# Altium PCB efm8sb1-dev-board.PcbDoc
Units mil, origin at the board's own origin, x right, y up, seen from the top; angles counter-clockwise.
Board outline 1075 x 800 mil, 2 copper layers (Top Layer, Bottom Layer), stack 34.8 mil thick; 25 components, 32 nets, 157 pads, 14 vias.
Unrouted connection lines stored in the file: 74.
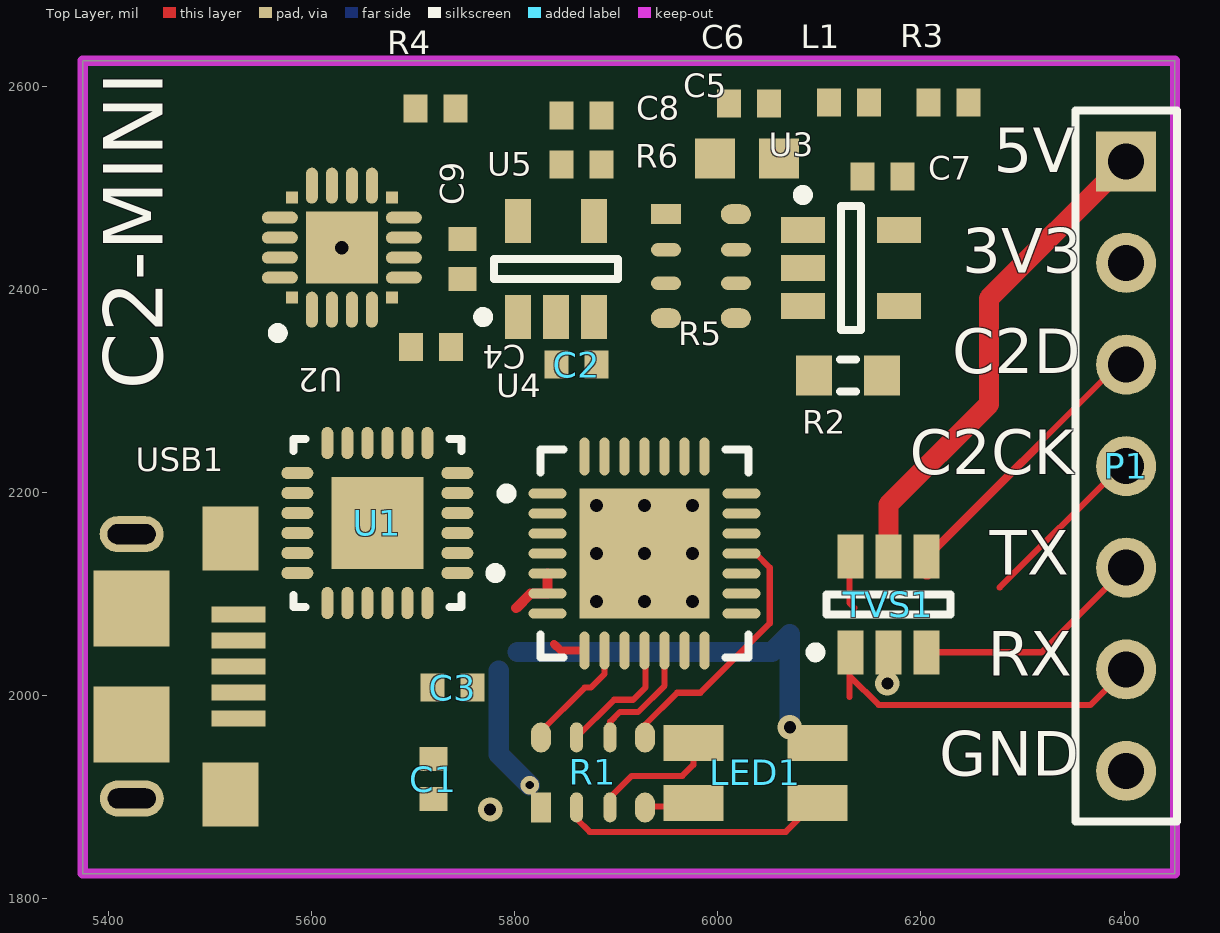
[diagram p0: Top Layer view]
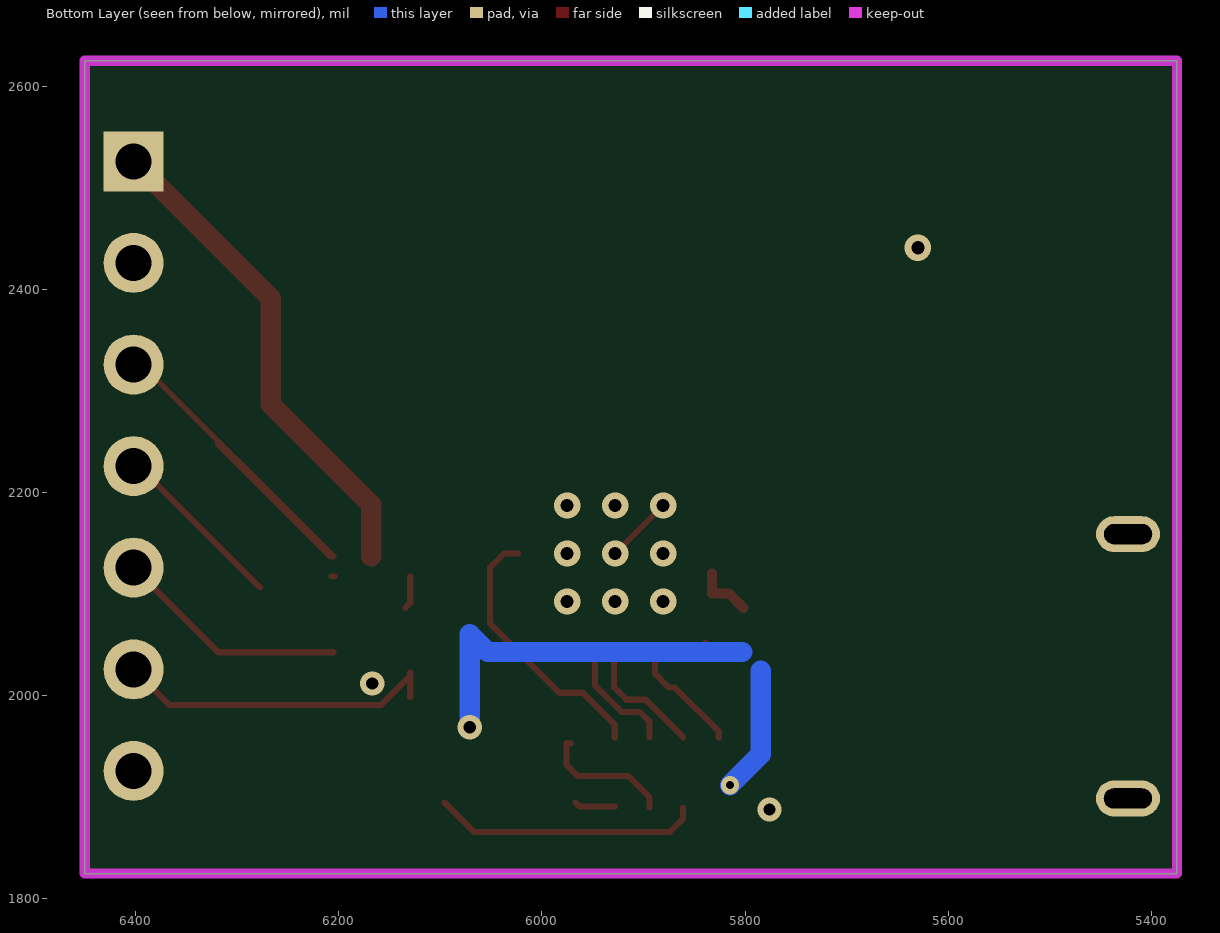
[diagram p1: Bottom Layer view, seen from below]

## Layer stack, top to bottom
Top Solder: solder mask 0.4, Solder Resist, Dk 3.5
Top Layer: signal copper 1.4
Dielectric 1: dielectric 32, FR-4, Dk 4.8
Bottom Layer: signal copper 1.4
Bottom Solder: solder mask 0.4, Solder Resist, Dk 3.5

## Board outline
5375,1825 6450,1825 6450,2625 5375,2625

## Design rules (kind name [scope] priority, off if disabled: settings)
Clearance [All] p1: gap=6 ignorepadtopadclearanceinfootprint=FALSE except(0: Arc-Hole Track-Hole SMDPad-Hole THPad-Hole Via-Hole Fill-Hole Poly-Hole Region-Hole Text-Hole)
ComponentClearance [All] p1: gap=0 collisioncheckmode=3 verticalgap=0 showdistances=FALSE
DiffPairsRouting [All] p1: maxlimit=10 minlimit=6 mostfreqgap=10 toplayer_minwidth=6 toplayer_maxwidth=15 toplayer_prefwidth=8 bottomlayer_minwidth=6 bottomlayer_maxwidth=15 bottomlayer_prefwidth=8 maxuncoupledlength=500
HoleSize [All] p1: absolutevalues=TRUE maxlimit=500 minlimit=12 maxpercent=80.000 minpercent=20.000
HoleToHoleClearance [All] p1: gap=0 allowstackedmicrovias=TRUE
MinimumSolderMaskSliver [All] p1: minsoldermaskwidth=0
PlaneConnect [All] p1: planeconnectstyle=Direct reliefexpansion=20 reliefentries=4 reliefconductorwidth=10 reliefairgap=10
PolygonConnect [All] p1: connectstyle=Direct reliefconductorwidth=10 reliefentries=4 polygonreliefangle="90 Angle" airgapwidth=10
RoutingVias [All] p1: holewidth=12 width=24 viastyle="Through Hole" minholewidth=12 minwidth=24 maxholewidth=28 maxwidth=50
SilkToSilkClearance [All] p1: silktosilkclearance=0
SilkToSolderMaskClearance [IsPad] p1: minsilkscreentomaskgap=0 clearancetoexposedcopper=TRUE
SolderMaskExpansion [All] p1: expansion=0
Width [All] p1: maxlimit=500 minlimit=6 preferedwidth=8
22 further rules are at their usual default settings.

## Classes and differential pairs
net class Hub_Nets: NetU1_6 NetU1_7 NetU1_8 NetU1_10 NetU1_11 NetU1_12 NetU1_13 NetU1_14 NetU1_15 NetU1_16 NetU1_17 NetU1_21 NetU1_22 NetU1_23 NetU1_24
net class "Energy Monitor_Nets": 3V3A AGND CURSENSE_3 EM_C2CK_3 EM_C2D_3 EM_RANGE1_3 EM_RANGE2_3 NetC8_1 NetC8_2 NetL1_2 NetU2_8 NetU2_11 NetU2_13 NetU2_14 NetU2_15 NetU2_16 NetU2_19 NetU2_20
net class efm8sb1-dev-board_Nets: NetUSB1_4
net class Debugger_Nets: C2CK C2D LED_RUN LED_STOP NetLED1_2 NetLED1_3 NetLED1_4 NetU4_13 NetU4_14 NetU4_15 NetU4_16 NetU4_17 NetU4_19 NetU4_20 NetU4_21 NetU4_22 NetU4_23 NetU4_24 NetU4_25 NetU4_26 NetU4_27 POWER
component class Hub: U1
component class "Energy Monitor": C1 C2 C3 C5 C6 C7 C8 C9 L1 R2 R3 R4 R5 R6 U2 U3 U5
component class efm8sb1-dev-board: P1 TVS1 USB1
component class Debugger: C4 LED1 R1 U4

## Components (designator, comment, footprint, x,y, rotation, side; value= is the part's Value field where it differs from the comment)
C1 "0u1" CAPC1005N 5720,1918 r90 top
C2 "5.6nF" CAPC1005N 5861,2326 r0 top
C3 "5.6nF" CAPC1005N 5739,2008 r0 top
C4 "0u1" CAPC1005N 5718,2343 r180 top
C5 "10u" CAPC1608N 6029,2529 r180 top
C6 "0u1" CAPC1005N 6031,2583 r180 top
C7 "0u1" CAPC1005N 6162,2511 r0 top
C8 "10p" CAPC1005N 5866,2571 r180 top
C9 "0u1" CAPC1005N 5749,2430 r90 top
L1 "Inductor" INDC1005N 6129,2584 r0 top value=330R
LED1 "LED3528" LED3528 6037,1924 r0 top
P1 "Header 7" HDR1X7-PINS 6402,2526 r270 top
R1 "Res Pack5" RESNET_8_1206 5828,1890 r90 top value=10K
R2 "4R7" RESC1608N 6128,2315 r0 top
R3 "10R" RESC1005N 6227,2584 r0 top
R4 "0R" RESC1005N 5722,2578 r0 top
R5 "Res Pack5" RESNET_8_1206 5949,2472 r0 top value=1K
R6 "200k" RESC1005N 5866,2523 r180 top
TVS1 "ESD TVS-5" SOT26A-6N 6168,2090 r90 top
U1 "USB2422/MJ" QFN50P400X400-24V2N 5665,2170 r180 top
U2 "EFM8UB10F16G-B-QFN20" QFN50P300X300X90-20N 5630,2441 r90 top
U3 "INA180A1IDBVR" SOT23-5AN 6131,2421 r0 top
U4 "C8051F326-GM" QFN50P500X500-28VAN 5928,2140 r0 top
U5 "TSV991ILT" SOT23-5AN 5841,2420 r90 top
USB1 "USB Micro B Receptacle" 10118193-0001LF 5555,2029 r270 top

## Footprints (in the part's own frame and the unit in brackets; to place one, negate y for a bottom-side part, rotate by r counter-clockwise, add the part's x,y. Pads: shape width x height; smd on the part's side, far side on the other; paste and mask are expansions set on the pad)
10118193-0001LF [mm]
  oval 0.9x1.6 hole 0.5 slot 1.2 at 90 deg: 0(-3.304,-3.35) 0(3.304,-3.346)
  rect 1.6x1.4 smd: 0(-3.2,-0.875) 0(3.2,-0.875)
  rect 1.9x1.9 smd: 0(-1.45,-3.35) 0(1.45,-3.35)
  rect 0.4x1.35 smd: 1(-1.3,-0.675) 2(-0.65,-0.675) 3(0,-0.675) 4(0.65,-0.675) 5(1.3,-0.675)
  body extent -3.93,-6.1 3.93,-0.44, height 2.83
CAPC1005N [mm] "Chip Capacitor (0402), Body 1.0x0.5mm, IPC Medium Density"
  rect 0.6x0.7 smd: 1(-0.5,0) 2(0.5,0)
  body extent -0.51,-0.26 0.51,0.26, height 0.61
CAPC1608N [mm] "Chip Capacitor (0603), Body 1.6x0.8mm, IPC Medium Density"
  rect 1x1 smd: 1(-0.8,0) 2(0.8,0)
  body extent -0.8,-0.41 0.8,0.41, height 0.91
HDR1X7-PINS [mm] "Connector; Header; 7 Position"
  rect 1.5x1.5 hole 0.9: 1(0,0)
  round 1.5 hole 0.9: 2(2.54,0) 3(5.08,0) 4(7.62,0) 5(10.16,0) 6(12.7,0) 7(15.24,0)
  silkscreen extent -1.27,-1.27 16.51,1.27, body extent -1.27,-1.22 16.51,1.22, height 10.3
INDC1005N [mm] "Chip Inductor, Body 1.0x0.5mm, IPC Medium Density"
  rect 0.6x0.7 smd: 1(-0.5,0) 2(0.5,0)
  body extent -0.59,-0.32 0.59,0.32, height 0.65
LED3528 [mm]
  rect 1.5x0.9 smd paste+0: 1(1.55,0.75) 2(1.55,-0.75) 3(-1.55,0.75) 4(-1.55,-0.75)
  body extent -1.78,-1.4 1.73,1.4, height 1.9
QFN50P300X300X90-20N [mm] "QFN, 16+4 Leads, Body 3.00x3.00mm, Pitch 0.50mm, IPC Medium Density"
  rect 0.3x0.3 smd: 1(-1.25,1.25) 6(-1.25,-1.25) 11(1.25,-1.25) 16(1.25,1.25)
  oval 0.9x0.3 smd: 2(-1.55,0.75) 3(-1.55,0.25) 4(-1.55,-0.25) 5(-1.55,-0.75) 12(1.55,-0.75) 13(1.55,-0.25) 14(1.55,0.25) 15(1.55,0.75)
  oval 0.3x0.9 smd: 7(-0.75,-1.55) 8(-0.25,-1.55) 9(0.25,-1.55) 10(0.75,-1.55) 17(0.75,1.55) 18(0.25,1.55) 19(-0.25,1.55) 20(-0.75,1.55)
  rect 1.8x1.8 smd mask+0: 21(0,0)
  silkscreen extent -2.26,1.48 -2.01,1.72, body extent -1.5,-1.5 1.5,1.5, height 0.92
QFN50P400X400-24V2N [mm] "QFN, 24-Leads, Body 4x4mm, Pitch 0.5mm, IPC Medium Density"
  oval 0.8x0.3 smd: 1(-2,1.25) 2(-2,0.75) 3(-2,0.25) 4(-2,-0.25) 5(-2,-0.75) 6(-2,-1.25) 13(2,-1.25) 14(2,-0.75) 15(2,-0.25) 16(2,0.25) 17(2,0.75) 18(2,1.25)
  oval 0.3x0.8 smd: 7(-1.25,-2) 8(-0.75,-2) 9(-0.25,-2) 10(0.25,-2) 11(0.75,-2) 12(1.25,-2) 19(1.25,2) 20(0.75,2) 21(0.25,2) 22(-0.25,2) 23(-0.75,2) 24(-1.25,2)
  rect 2.3x2.3 smd: 25(0,0)
  silkscreen extent -3.08,-2.1 2.1,2.1, body extent -1.99,-2.01 2.01,1.99, height 1
QFN50P500X500-28VAN [mm] "28-Pin Plastic Quad Flat No-Lead 0.5 mm Pitch, 3.25 x 3.25 thermal pad"
  oval 0.95x0.25 smd: 1(-2.425,1.5) 2(-2.425,1) 3(-2.425,0.5) 4(-2.425,0) 5(-2.425,-0.5) 6(-2.425,-1) 7(-2.425,-1.5) 15(2.425,-1.5) 16(2.425,-1) 17(2.425,-0.5) 18(2.425,0) 19(2.425,0.5) 20(2.425,1) 21(2.425,1.5)
  oval 0.25x0.95 smd: 8(-1.5,-2.425) 9(-1,-2.425) 10(-0.5,-2.425) 11(0,-2.425) 12(0.5,-2.425) 13(1,-2.425) 14(1.5,-2.425) 22(1.5,2.425) 23(1,2.425) 24(0.5,2.425) 25(0,2.425) 26(-0.5,2.425) 27(-1,2.425) 28(-1.5,2.425)
  rect 3.25x3.25 smd: 29(0,0)
  silkscreen extent -3.57,-2.6 2.6,2.6, body extent -2.5,-2.5 2.5,2.5, height 1
RESC1005N [mm] "Chip Resistor, Body 1.1x0.5mm, IPC Medium Density"
  rect 0.6x0.7 smd: 1(-0.5,0) 2(0.5,0)
  body extent -0.5,-0.25 0.5,0.25, height 0.35
RESC1608N [mm] "Chip Resistor, Body 1.6x0.8mm, IPC Medium Density"
  rect 0.9x1 smd: 1(-0.85,0) 2(0.85,0)
  silkscreen extent -0.2,-0.4 0.2,0.4, body extent -0.8,-0.4 0.8,0.4, height 0.55
RESNET_8_1206 [mm]
  rect 0.75x0.5 smd: 1(0,0.05)
  oval 0.75x0.33 smd: 2(0.003,-0.838) 3(0.003,-1.676) 6(1.753,-1.676) 7(1.753,-0.838)
  oval 0.75x0.5 smd: 4(0,-2.55) 5(1.75,-2.55) 8(1.75,0.05)
  body extent 0.09,-2.84 1.69,0.36, height 0.5
SOT23-5AN [mm] "SOT23, 5-Leads, Body 2.9x1.6mm, Pitch 0.95mm, Lead Span 2.8mm, IPC Medium Density"
  rect 1.1x0.65 smd: 1(-1.2,0.95) 2(-1.2,0) 3(-1.2,-0.95) 4(1.2,-0.95) 5(1.2,0.95)
  silkscreen extent -1.32,-1.55 0.25,1.95, body extent -1.5,-1.5 1.5,1.5, height 1.3
SOT26A-6N [mm] "SOT23, 6-Leads, Body 2.9x1.7mm, Pitch 0.95mm, Lead Span 2.8mm, IPC Medium Density"
  rect 1.1x0.65 smd: 1(-1.2,0.95) 2(-1.2,0) 3(-1.2,-0.95) 4(1.2,-0.95) 5(1.2,0) 6(1.2,0.95)
  silkscreen extent -1.32,-1.55 0.25,1.95, body extent -1.5,-1.5 1.5,1.5, height 1.3

## Part data
C1 C2 C3 C4 C5 C6 C7 C8 C9: library part "Cap Semi", "Capacitor (Semiconductor SIM Model)", LatestRevisionDate=29-May-2009, LatestRevisionNote="IPC-7351 Footprint Added.", PackageDescription="Chip Capacitor", PackageReference=C1206, Published=8-Jun-2000, Publisher="Altium Limited"
LED1: library part LED_RGB, "RGB LED", Supplier Part Number 1=732-4998-1-ND, LatestRevisionDate=08-Jul-2005, LatestRevisionNote="Mech Layer 1 removed.", PackageDescription="LED; 2 Leads", PackageReference=LED-0, Published=8-Jun-2000, Publisher="Altium Limited", Supplier 1=Digi-Key
P1: "Header, 7-Pin", LatestRevisionDate=17-Jul-2002, LatestRevisionNote="Re-released for DXP Platform.", Publisher="Altium Limited"
R1 R5: "Isolated Resistor Network - Parts", Code_IPC=SOIC127P600-16, Code_JEDEC=MS-012-AC, LatestRevisionDate=29-May-2009, LatestRevisionNote="IPC-7351 Footprint Added.", PackageDescription="16-Pin Small Outline Integrated Circuit 1.27 mm Pitch", PackageReference=SOIC16, Published=24-Mar-1999, Publisher="Altium Limited", Sim Note="Enter the Resistance value into parameter field."
R2 R3 R4 R6: library part "Res Semi", "Semiconductor Resistor", LatestRevisionDate=17-Jul-2002, LatestRevisionNote="Re-released for DXP Platform.", PackageDescription="Axial Device, Thru-Hole; 2 Leads; 0.5 in Pin Spacing", PackageReference=AXIAL-0.5, Published=8-Jun-2000, Publisher="Altium Limited"
TVS1: "5-channel ESD protection device for USB", Manufacturer Part Number 1=IP4220CZ6,125, Manufacturer Part Number 2=SRV05-4, Supplier Part Number 1=1727-3578-1-ND, Supplier 1=Digi-Key
U1: "IC HUB CTLR USB 2.0 24QFN", Base Part Number=USB2422, Current - Supply=-, Manufacturer="Microchip Technology", Operating Temperature="0°C ~ 70°C", Package / Case="24-VFQFN Exposed Pad", Supplier Device Package="24-QFN (4x4)", Supplier Part Number 1=USB2422/MJ-ND, Voltage - Supply=3.3V, Category="Integrated Circuits (ICs)", ComponentLink1Description=http://www.microchip.com/mymicrochip/filehandler.aspx?ddocname=en566992, ComponentLink1URL=http://www.microchip.com/mymicrochip/filehandler.aspx?ddocname=en566992, Function="Hub Controller", Interface=USB, Manufacturer Part Number=USB2422/MJ, Packaging=Tray, Part Status=Active, Pricing 1="1=1.6, 25=1.3288, 100=1.2875 (USD)", Protocol=USB, RoHS="RoHS Compliant", Standards="USB 2.0", Stock 1=2537, Supplier 1=Digi-Key
U2: "IC MCU 16KB 20QFN", Manufacturer="Silicon Labs", Operating Temperature="-40°C ~ 85°C", Package / Case="20-UFQFN Exposed Pad", Supplier Device Package="20-QFN (3x3)", Supplier Part Number 1=336-3182-5-ND, Voltage - Supply (Vcc/Vdd)="2.2 V ~ 5.25 V", Category="Integrated Circuits (ICs)", ComponentLink1Description=http://www.silabs.com/Support%20Documents/TechnicalDocs/EFM8UB1_DataSheet.pdf, ComponentLink1URL=http://www.silabs.com/Support%20Documents/TechnicalDocs/EFM8UB1_DataSheet.pdf, Connectivity="I²C, SMBus, SPI, UART/USART, USB", Core Processor="CIP-51 8051", Core Size=8-Bit, Data Converters="A/D 11x12b", EEPROM Size=-, Manufacturer Part Number=EFM8UB10F16G-B-QFN20, Number of I/O=13, Oscillator Type=Internal, Packaging=Tube, Peripherals="Brown-out Detect/Reset, POR, PWM, WDT", Pricing 1="1=1.18, 25=1.0832, 100=0.9848, 1000=0.88628 (USD)", Program Memory Size="16KB (16K x 8)", Program Memory Type=FLASH, RAM Size="2.25K x 8", RoHS="RoHS Compliant", Speed=50MHz, Stock 1=75, Supplier 1=Digi-Key
U3: Current - Supply=260µA, Manufacturer="Texas Instruments", Operating Temperature="-40°C ~ 125°C", Package / Case="SC-74A, SOT-753", Supplier Device Package=SOT-23-5, Supplier Part Number 1=296-47652-1-ND, Voltage - Supply, Single/Dual (±)="2.7 V ~ 5.5 V", Amplifier Type="Current Sense", Category="Integrated Circuits (ICs)", ComponentLink1Description=http://www.ti.com/lit/ds/symlink/ina180.pdf, ComponentLink1URL=http://www.ti.com/lit/ds/symlink/ina180.pdf, Manufacturer Part Number=INA180A1IDBVR, Mounting Type="Surface Mount", Output Type=Rail-to-Rail, Packaging="Cut Tape (CT)", Part Status=Active, Pricing 1="1=0.6, 10=0.51, 100=0.3807, 500=0.29912, 1000=0.23113 (USD)", RoHS="RoHS Compliant", Slew Rate="2 V/µs", Stock 1=1952, Supplier 1=Digi-Key
U4: "IC MCU 8BIT 16KB FLASH 28QFN", Manufacturer="Silicon Labs", Operating Temperature="-40°C ~ 85°C (TA)", Package / Case="28-VFQFN Exposed Pad", Supplier Device Package="28-QFN (5x5)", Supplier Part Number 1=CF326-SX0261GM, Voltage - Supply (Vcc/Vdd)="2.7 V ~ 3.6 V", Category="Integrated Circuits (ICs)", ComponentLink1Description=http://www.silabs.com/documents/public/data-sheets/C8051F326.pdf, ComponentLink1URL=http://www.silabs.com/documents/public/data-sheets/C8051F326.pdf, Connectivity="UART/USART, USB", Core Processor=8051, Core Size=8-Bit, Data Converters=-, EEPROM Size=-, Manufacturer Part Number=C8051F326-GM, Number of I/O=15, Oscillator Type=Internal, Packaging=Tube, Part Status=Active, Peripherals=POR, Pricing 1="1=1.42, 25=1.3632, 100=1.3108, 1000=1.26561 (USD)", Program Memory Size="16KB (16K x 8)", Program Memory Type=FLASH, RAM Size="1.5K x 8", RoHS="RoHS Compliant", Speed=25MHz, Stock 1=1461, Supplier 1=Digi-Key
U5: "IC OPAMP GP 20MHZ RRO SOT23-5", Base Part Number=TSV991, Current - Supply=820µA, Manufacturer=STMicroelectronics, Operating Temperature="-40°C ~ 125°C", Package / Case="SC-74A, SOT-753", Supplier Device Package=SOT-23-5, Supplier Part Number 1=497-6001-1-ND, Voltage - Supply, Single/Dual (±)="2.5 V ~ 5.5 V", Amplifier Type="General Purpose", Category="Integrated Circuits (ICs)", ComponentLink1Description=http://www.st.com/content/ccc/resource/technical/document/datasheet/d8/e3/a5/aa/8f/d7/42/67/CD00144611.pdf/files/CD00144611.pdf/jcr:content/translations/en.CD00144611.pdf, ComponentLink1URL=http://www.st.com/content/ccc/resource/technical/document/datasheet/d8/e3/a5/aa/8f/d7/42/67/CD00144611.pdf/files/CD00144611.pdf/jcr:content/translations/en.CD00144611.pdf, Manufacturer Part Number=TSV991ILT, Mounting Type="Surface Mount", Output Type=Rail-to-Rail, Packaging="Cut Tape (CT)", Part Status=Active, Pricing 1="1=0.76, 10=0.673, 100=0.516, 500=0.40788, 1000=0.3263 (USD)", RoHS="RoHS Compliant", Slew Rate="10 V/µs", Stock 1=2760, Supplier 1=Digi-Key
L1: Code_IEC=1005, Code_JEITA=0402, LatestRevisionDate=29-May-2009, LatestRevisionNote="IPC-7351 Footprint Added.", PackageDescription="Chip Inductor", PackageReference=0402-A, Published=8-Jun-2000, Publisher="Altium Limited"

## Via types
v1: diameter 25.98, hole 12.99, Top Layer to Bottom Layer, tented both sides, 9 vias
v2: diameter 24, hole 12, Top Layer to Bottom Layer, tented both sides, 3 vias
v3: diameter 25.98, hole 12.99, Top Layer to Bottom Layer, tented top, 1 vias
v4: diameter 18, hole 8, Top Layer to Bottom Layer, tented both sides, 1 vias

## Nets (pads, with @x,y where several pads share a name; then routed paths per layer and width w, separated by ;. In a path a pad name is that pad's centre, name@x,y a point inside that pad or via, vN(x,y) a via of type N, cw(c..) or ccw(c..) an arc to the next point about the centre after c; other vN are vias at no path point)
3V3: C1.2 C4.2 L1.1 LED1.1 R1.1 R2.1 R5.8 U1.1 U1.9 U1.18 U2.6 U2.7 U3.3 U4.5 U4.6 U4.7 | length 548.7
  Top Layer w10: 5801.55,2086.27 5815.92,2100.63 U4.6 U4.5
  Bottom Layer w20: 5784.6,2024.6 5784.6,1942.4 v4(5815,1912) ; 5803,2043 6053.4,2043 6071,2060.6 v2(6071,1969)
3V3A: C5.2 C6.2 C7.2 C9.2 R3.2 U3.5 U5.5
3V_TARGET: P1.2 R2.2 U3.4
AGND: C2.1 C3.1 C5.1 C6.1 C7.1 C9.1 R4.2 R5.5 U3.2 U5.2
  other v2: 5776,1888
C2CK: R1.8 U4.9 | length 115.1
  Top Layer w6: R1.8 5826.03,1964.9 5869.13,2008 5875.13,2008 5888.63,2021.5 U4.9
C2CLK_1: P1.4 TVS1.6 U4.1 | length 206.5
  Top Layer w6: TVS1.6@6129.6,2117.24 6129.6,2091.4 6134.41,2086.59 ; 6277.59,2106.59 6397,2226 P1.4
C2D: U4.10 | length 0.4
  Top Layer w8: U4.10@5908,2044.21 U4.10
C2DAT_1: P1.3 TVS1.4 U4.28 | length 434.3
  Top Layer w6: TVS1.4@6204.4,2117.24 TVS1.4@6207.24,2117.24 ; TVS1.4 6394.16,2326 P1.3 ; TVS1.4@6208.24,2137.24 6319,2248
CURSENSE_3: R5.7 U3.1
D1_1_N: U1.2 U4.4
D1_1_P: U1.3 U4.3
D2_1_N: U1.4 U2.5
D2_1_P: U1.5 U2.4
D_1_N: U1.19 USB1.2
D_1_P: U1.20 USB1.3
EM_C2CK_3: R5.1 U2.9
EM_C2D_3: U2.10
EM_RANGE1_3: C2.2 R5.2 U2.2 U5.3
EM_RANGE2_3: C3.2 R5.3 U2.1
GND: C1.1 C4.1 P1.7 R4.1 TVS1.2 U1.25 U2.3 U2.12 U2.21 U4.2 U4.29 USB1.5 | length 55.7
  Top Layer w6: U4.29@5888.63,2179.37 v1(5928,2140)
  other v1: 5880.76,2092.76 5928,2092.76 5975.24,2092.76 5880.76,2140 5975.24,2140 5880.76,2187.24 5928,2187.24 5975.24,2187.24
  other v2: 6167,2012
  other v3: 5630,2441
LED_RUN: R1.6 U4.18 | length 265
  Top Layer w6: 5928.39,1958.9 5928.39,1971.43 5959.94,2002.97 5982.97,2002.97 6051.17,2071.17 6051.17,2126.08 6037.25,2140 U4.18
LED_STOP: R1.5 U4.12 | length 118.3
  Top Layer w6: 5894,1959 5894,1974.37 5903.63,1984 5921.67,1984 5947.69,2010.02 U4.12
NetC8_1: C8.1 R5.4 R6.1 U5.4
NetC8_2: C8.2 R5.6 R6.2 U5.1
NetL1_2: L1.2 R3.1
NetLED1_2: LED1.2 R1.2 | length 263.5
  Top Layer w6: R1.2 5861,1879 5874,1866 6067,1866 LED1.2@6096,1895
NetLED1_3: LED1.3 R1.4 | length 127.4
  Top Layer w6: 5894,1890.1 5894,1900 5915.19,1921.19 5965.19,1921.19 5975.98,1931.98 LED1.3 ; LED1.3@5971.45,1953 LED1.3@5971.98,1953.53
NetLED1_4: LED1.4 R1.3 | length 40.2
  Top Layer w6: 5928.39,1891.1 5963.1,1891.1 LED1.4@5967,1895
POWER: R1.7 U4.11 | length 125.1
  Top Layer w6: R1.7 5898,1996 5916.7,1996 5929,2008.3 5929,2043.53 U4.11
RX_1: P1.6 TVS1.1 U2.17 | length 321.4
  Top Layer w6: 6129.6,1998.7 TVS1.1@6129.6,2022.76 ; 6130.6,2018.7 6158.3,1991 6367,1991 P1.6
TX_1: P1.5 TVS1.3 U2.18 | length 231.1
  Top Layer w6: TVS1.3 6318.76,2042.76 P1.5
VBUS: P1.1 TVS1.5 U4.8 USB1.1 | length 518.3
  Top Layer w8: 5839,2051 5845.47,2044.53 U4.8
  Top Layer w20: TVS1.5 6168,2188 6267,2287 6267,2391 P1.1
pads on no net: U1.6 U1.7 U1.8 U1.10 U1.11 U1.12 U1.13 U1.14 U1.15 U1.16 U1.17 U1.21 U1.22 U1.23 U1.24 U2.8 U2.11 U2.13 U2.14 U2.15 U2.16 U2.19 U2.20 U4.13 U4.14 U4.15 U4.16 U4.17 U4.19 U4.20 U4.21 U4.22 U4.23 U4.24 U4.25 U4.26 U4.27 USB1.0 USB1.4

## Keep-outs
Keep-Out Layer:
  the board outline again, w10

## Silkscreen, mask and mechanical layers (free items; w line width, h text height)
Top Overlay:
  text "5V" at 6271.86,2501 h75
  text "3V3" at 6240.7,2402.01 h75
  text "C2D" at 6230.85,2302.95 h75
  text "C2-MINI" at 5473,2301 h100 r90
  text "C2CK" at 6189,2203.97 h75
  text "TX" at 6267.63,2104.63 h75
  text "RX" at 6265.69,2005.64 h75
  text "GND" at 6217.87,1907 h75